# Altium PCB ArduinoMainBoard.PcbDoc
Units mil, origin at the board's own origin, x right, y up, seen from the top; angles counter-clockwise.
Board outline 6000 x 4000 mil, 2 copper layers (Top Layer, Bottom Layer); 16 components, 0 nets, 114 pads, 0 vias.
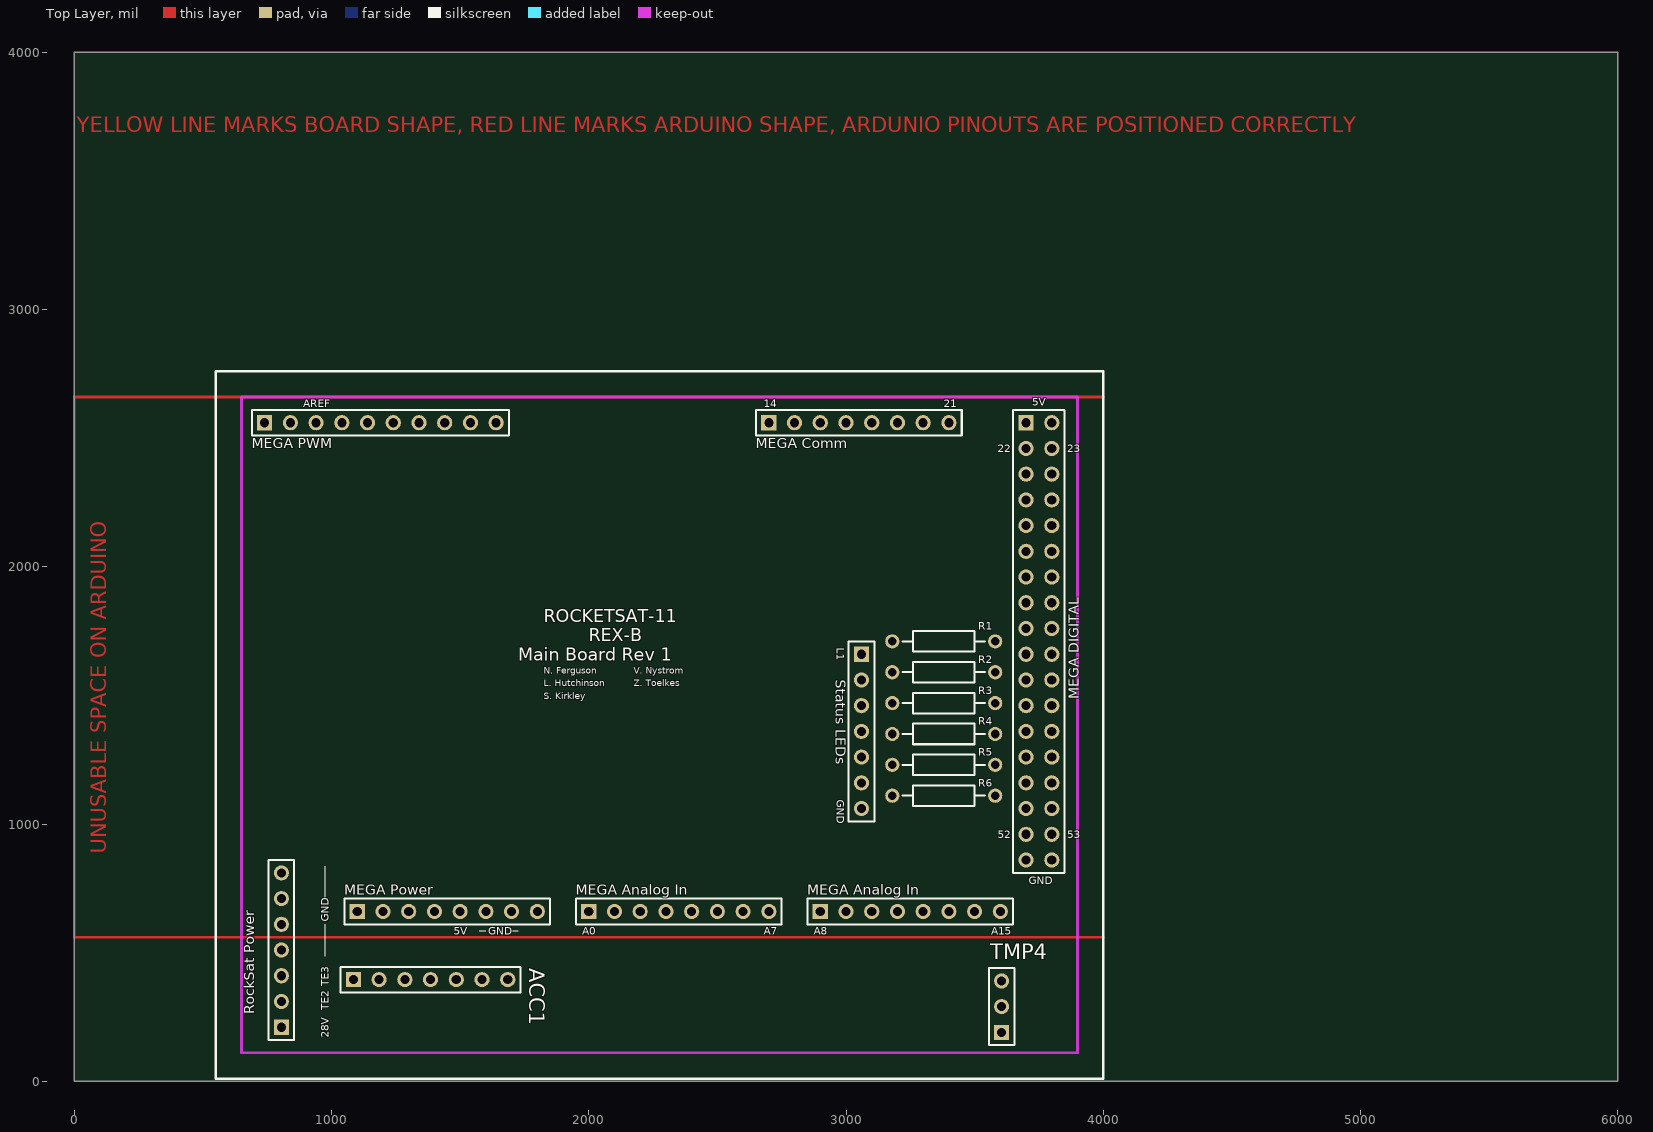
[diagram p0: Top Layer view]
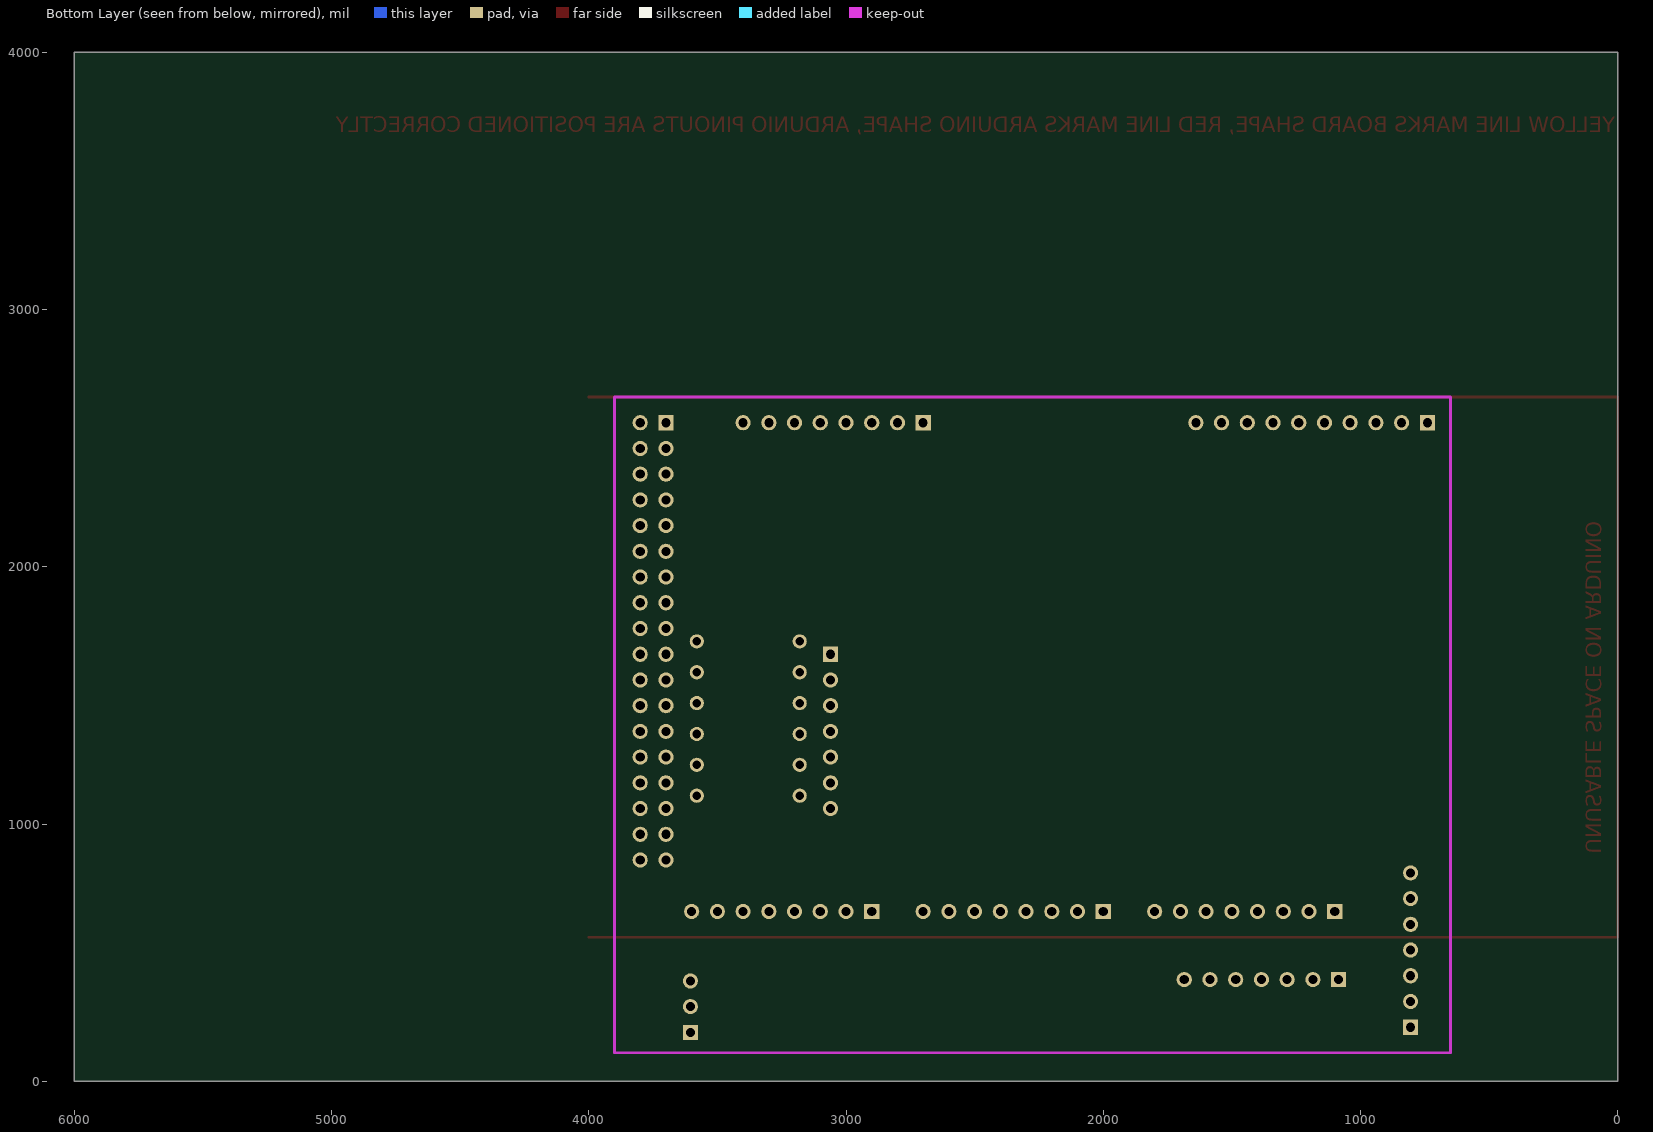
[diagram p1: Bottom Layer view, seen from below]

## Layer stack, top to bottom
Top Layer: signal copper 1.4
Dielectric: dielectric 12.6, FR-4, Dk 4.8
Bottom Layer: signal copper 1.4

## Board outline
0,0 6000,0 6000,4000 0,4000

## Design rules (kind name [scope] priority, off if disabled: settings)
Clearance [All] p1: gap=10
ComponentClearance [All] p1: gap=5 collisioncheckmode=3 verticalgap=10 showdistances=FALSE
PolygonConnect [All] p1: connectstyle=Relief reliefconductorwidth=10 reliefentries=4 polygonreliefangle="90 Angle"
RoutingVias [All] p1: holewidth=28 width=50 viastyle="Through Hole" minholewidth=28 minwidth=50 maxholewidth=28 maxwidth=50
SilkToSilkClearance [All] p1: silktosilkclearance=5
SilkscreenOverComponentPads [All] p1: minsilkscreentomaskgap=10
SolderMaskExpansion [All] p1: expansion=4
Width [All] p1: maxlimit=10 minlimit=10 preferedwidth=10
25 further rules are at their usual default settings.

## Classes and differential pairs
component class Analog_Input: ACC1 "MEGA Analog In" "MEGA PWM" TMP4
component class ArduinoPWR-COMM-DIG_SDCard: "MEGA Comm" "MEGA DIGITAL" "MEGA Power" R1 R2 R3 R4 R5 R6 "Status LEDs"

## Components (designator, comment, footprint, x,y, rotation, side; value= is the part's Value field where it differs from the comment)
ACC1 "Accelerometer" HDR1X7 1085,395 r0 top
"MEGA Analog In" "MEGA Analog Input 2" HDR1X8 2900,660 r0 top (schematic designator M3)
"MEGA Analog In" "MEGA Analog In 1" HDR1X8 2000,660 r0 top (schematic designator M2)
"MEGA Comm" "MEGA Communication" HDR1X8 2700,2560 r0 top (schematic designator M5)
"MEGA DIGITAL" "MEGA Dgital" HDR2X18 3700,2560 r270 top (schematic designator M4)
"MEGA Power" "MEGA Power" HDR1X8 1100,660 r0 top (schematic designator M1)
"MEGA PWM" "MEGA PWN Output" HDR1X10 740,2560 r0 top (schematic designator M6)
R1 "Res2" AXIAL-0.4 3380,1710 r180 top
R2 "Res2" AXIAL-0.4 3380,1590 r180 top
R3 "Res2" AXIAL-0.4 3380,1470 r180 top
R4 "Res2" AXIAL-0.4 3380,1350 r180 top
R5 "Res2" AXIAL-0.4 3380,1230 r180 top
R6 "Res2" AXIAL-0.4 3380,1110 r180 top
"RockSat Power" "RS Power" HDR1X7 805,210 r90 top (schematic designator RS1)
"Status LEDs" "Status LEDs" HDR1X7 3060,1660 r270 top (schematic designator S1)
TMP4 "Amb Temp" HDR1X3 3605,190 r90 top

## Footprints (in the part's own frame and the unit in brackets; to place one, negate y for a bottom-side part, rotate by r counter-clockwise, add the part's x,y. Pads: shape width x height; smd on the part's side, far side on the other; paste and mask are expansions set on the pad)
AXIAL-0.4 [mm] "Axial Device, Thru-Hole; 2 Leads; 0.4 in Pin Spacing"
  round 1.4 hole 0.85: 1(-5.08,0) 2(5.08,0)
  silkscreen extent -4.06,-1.02 4.06,1.02
HDR1X3 [mm] "Connector; Header; 3 Position"
  rect 1.5x1.5 hole 0.9: 1(0,0)
  round 1.5 hole 0.9: 2(2.54,0) 3(5.08,0)
  silkscreen extent -1.27,-1.27 6.35,1.27
HDR1X7 [mm] "Connector; Header; 7 Position"
  rect 1.5x1.5 hole 0.9: 1(0,0)
  round 1.5 hole 0.9: 2(2.54,0) 3(5.08,0) 4(7.62,0) 5(10.16,0) 6(12.7,0) 7(15.24,0)
  silkscreen extent -1.27,-1.27 16.51,1.27
HDR1X8 [mm] "Connector; Header; 8 Position"
  rect 1.5x1.5 hole 0.9: 1(0,0)
  round 1.5 hole 0.9: 2(2.54,0) 3(5.08,0) 4(7.62,0) 5(10.16,0) 6(12.7,0) 7(15.24,0) 8(17.78,0)
  silkscreen extent -1.27,-1.27 19.05,1.27
HDR1X10 [mm] "Connector; Header; 10 Position"
  rect 1.5x1.5 hole 0.9: 1(0,0)
  round 1.5 hole 0.9: 2(2.54,0) 3(5.08,0) 4(7.62,0) 5(10.16,0) 6(12.7,0) 7(15.24,0) 8(17.78,0) 9(20.32,0) 10(22.86,0)
  silkscreen extent -1.27,-1.27 24.13,1.27
HDR2X18 [mm] "Connector; Header; 18x2 Position"
  rect 1.5x1.5 hole 0.9: 1(0,0)
  round 1.5 hole 0.9: 2(0,2.54) 3(2.54,0) 4(2.54,2.54) 5(5.08,0) 6(5.08,2.54) 7(7.62,0) 8(7.62,2.54) 9(10.16,0) 10(10.16,2.54) 11(12.7,0) 12(12.7,2.54) 13(15.24,0) 14(15.24,2.54) 15(17.78,0) 16(17.78,2.54) 17(20.32,0) 18(20.32,2.54) 19(22.86,0) 20(22.86,2.54) 21(25.4,0) 22(25.4,2.54) 23(27.94,0) 24(27.94,2.54) 25(30.48,0) 26(30.48,2.54) 27(33.02,0) 28(33.02,2.54) 29(35.56,0) 30(35.56,2.54) 31(38.1,0) 32(38.1,2.54) 33(40.64,0) 34(40.64,2.54) 35(43.18,0) 36(43.18,2.54)
  silkscreen extent -1.27,-1.27 44.45,3.81

## Part data
ACC1 "RockSat Power" "Status LEDs": library part "Header 7", "Header, 7-Pin"
"MEGA Analog In" "MEGA Analog In" "MEGA Comm" "MEGA DIGITAL" "MEGA Power": library part Component_1
"MEGA PWM": library part "Header 10", "Header, 10-Pin"
R1 R2 R3 R4 R5 R6: "Resistor"
TMP4: library part "Header 3", "Header, 3-Pin"

## Nets (pads, with @x,y where several pads share a name; then routed paths per layer and width w, separated by ;. In a path a pad name is that pad's centre, name@x,y a point inside that pad or via, vN(x,y) a via of type N, cw(c..) or ccw(c..) an arc to the next point about the centre after c; other vN are vias at no path point)
pads on no net: "MEGA Analog In.1" "MEGA Analog In.2" "MEGA Analog In.3" "MEGA Analog In.4" "MEGA Analog In.5" "MEGA Analog In.6" "MEGA Analog In.7" "MEGA Analog In.8" "MEGA Comm.1" "MEGA Comm.2" "MEGA Comm.3" "MEGA Comm.4" "MEGA Comm.5" "MEGA Comm.6" "MEGA Comm.7" "MEGA Comm.8" "MEGA DIGITAL.1" "MEGA DIGITAL.2" "MEGA DIGITAL.3" "MEGA DIGITAL.4" "MEGA DIGITAL.5" "MEGA DIGITAL.6" "MEGA DIGITAL.7" "MEGA DIGITAL.8" "MEGA DIGITAL.9" "MEGA DIGITAL.10" "MEGA DIGITAL.11" "MEGA DIGITAL.12" "MEGA DIGITAL.13" "MEGA DIGITAL.14" "MEGA DIGITAL.15" "MEGA DIGITAL.16" "MEGA DIGITAL.17" "MEGA DIGITAL.18" "MEGA DIGITAL.19" "MEGA DIGITAL.20" "MEGA DIGITAL.21" "MEGA DIGITAL.22" "MEGA DIGITAL.23" "MEGA DIGITAL.24" "MEGA DIGITAL.25" "MEGA DIGITAL.26" "MEGA DIGITAL.27" "MEGA DIGITAL.28" "MEGA DIGITAL.29" "MEGA DIGITAL.30" "MEGA DIGITAL.31" "MEGA DIGITAL.32" "MEGA DIGITAL.33" "MEGA DIGITAL.34" "MEGA DIGITAL.35" "MEGA DIGITAL.36" "MEGA Power.1" "MEGA Power.2" "MEGA Power.3" "MEGA Power.4" "MEGA Power.5" "MEGA Power.6" "MEGA Power.7" "MEGA Power.8" "MEGA PWM.1" "MEGA PWM.2" "MEGA PWM.3" "MEGA PWM.4" "MEGA PWM.5" "MEGA PWM.6" "MEGA PWM.7" "MEGA PWM.8" "MEGA PWM.9" "MEGA PWM.10" "RockSat Power.1" "RockSat Power.2" "RockSat Power.3" "RockSat Power.4" "RockSat Power.5" "RockSat Power.6" "RockSat Power.7" "Status LEDs.1" "Status LEDs.2" "Status LEDs.3" "Status LEDs.4" "Status LEDs.5" "Status LEDs.6" "Status LEDs.7" ACC1.1 ACC1.2 ACC1.3 ACC1.4 ACC1.5 ACC1.6 ACC1.7 R1.1 R1.2 R2.1 R2.2 R3.1 R3.2 R4.1 R4.2 R5.1 R5.2 R6.1 R6.2 TMP4.1 TMP4.2 TMP4.3
copper on no net: | length 10100
  Top Layer w10: 4000,560 625,560 0,560 0,2660 4000,2660

## Keep-outs
Keep-Out Layer:
  lines w10: 650,110 650,2660 3900,2660 3900,110 650,110

## Other copper
Top Layer:
  text "YELLOW LINE MARKS BOARD SHAPE, RED LINE MARKS ARDUINO SHAPE, ARDUNIO PINOUTS ARE POSITIONED CORRECTLY" at 10,3690 h60
  text "UNUSABLE SPACE ON ARDUINO" at 125,885 h60 r90

## Silkscreen, mask and mechanical layers (free items; w line width, h text height)
Top Overlay:
  lines w3: 975,485 975,610 ; 975,710 975,835
  lines w4: 1575,585 1600,585 ; 1700,585 1725,585
  lines w10: 550,10 550,2760 4000,2760 4000,2660 4000,560 4000,10 550,10
  text "AREF" at 890,2620 h30
  text "14" at 2680,2620 h30
  text "21" at 3380,2620 h30
  text "22" at 3590,2445 h30
  text "23" at 3860,2445 h30
  text "ROCKETSAT-11" at 1825,1785 h50
  text "REX-B" at 2000,1710 h50
  text "L1" at 2965,1685 h30 r270
  text "Main Board Rev 1" at 1725,1635 h50
  text "N. Ferguson" at 1825,1585 h25
  text "V. Nystrom" at 2175,1585 h25
  text "L. Hutchinson" at 1825,1535 h25
  text "Z. Toelkes" at 2175,1535 h25
  text "S. Kirkley" at 1825,1485 h25
  text "GND" at 2965,1095 h30 r270
  text "52" at 3590,945 h30
  text "53" at 3860,945 h30
  text "GND" at 990,620 h30 r90
  text "5V" at 1475,570 h30
  text "GND" at 1610,570 h30
  text "A0" at 1975,570 h30
  text "A7" at 2680,570 h30
  text "A8" at 2875,570 h30
  text "A15" at 3565,570 h30
  text "TE3" at 990,370 h30 r90
  text "TE2" at 990,275 h30 r90
  text "28V" at 990,170 h30 r90

## Text inside footprints (layer, text, board x,y; h text height)
"MEGA DIGITAL": Top Overlay "GND" at 3710,765 h30; Top Overlay "5V" at 3725,2625 h30